# Altium PCB Kretsn_Brillz.PcbDoc
Units mil, origin at the board's own origin, x right, y up, seen from the top; angles counter-clockwise.
Board outline 6490 x 3090 mil, 2 copper layers (Top Layer, Bottom Layer); 15 components, 17 nets, 72 pads, 35 vias.
Unrouted connection lines stored in the file: 4.
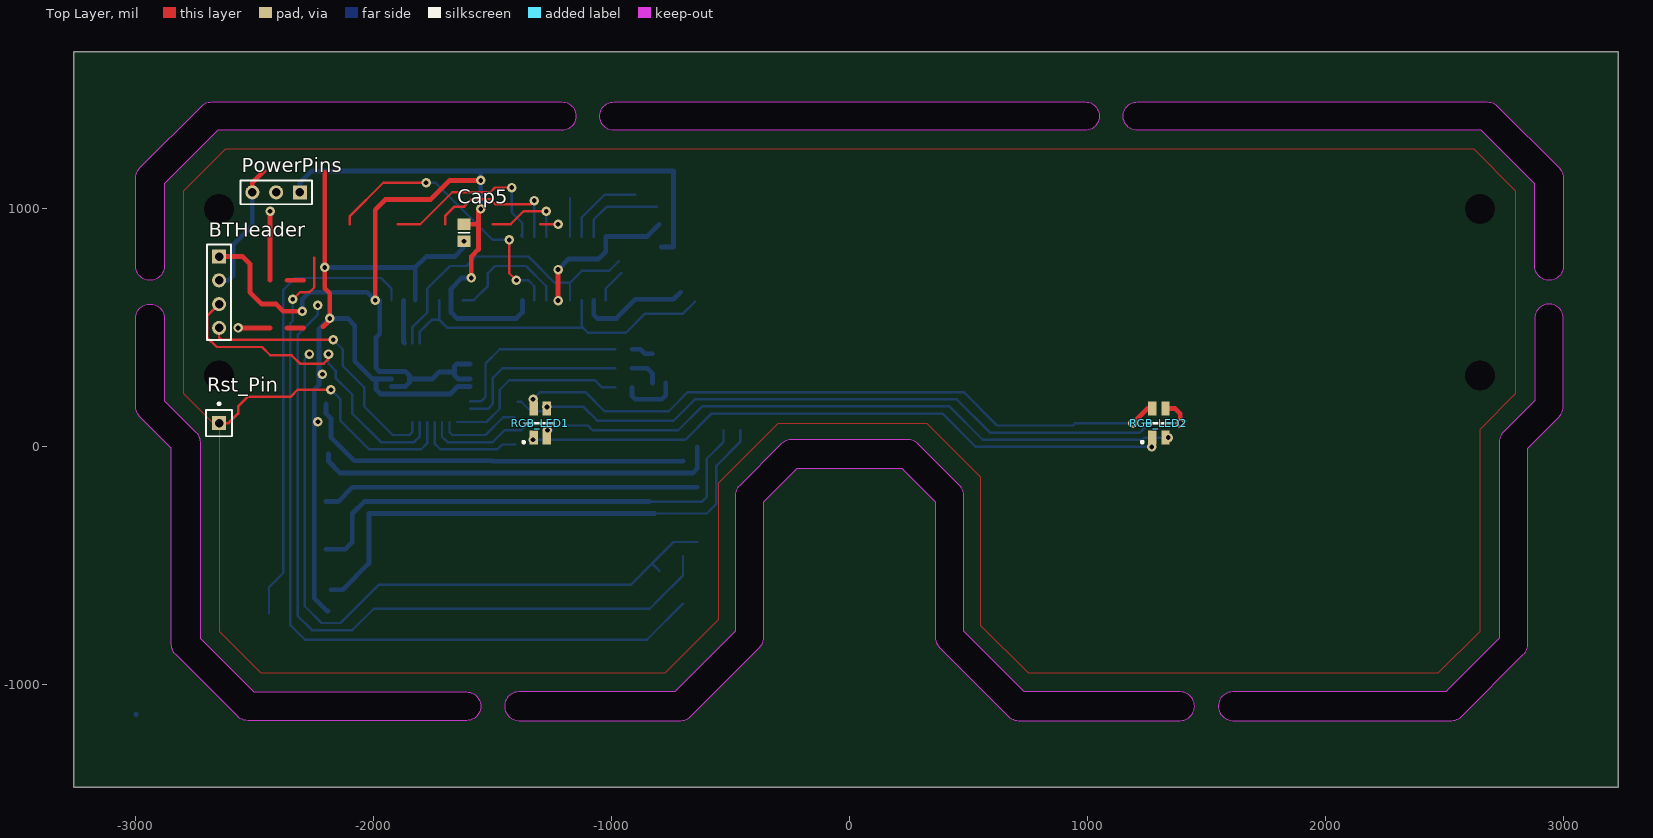
[diagram p0: Top Layer view]
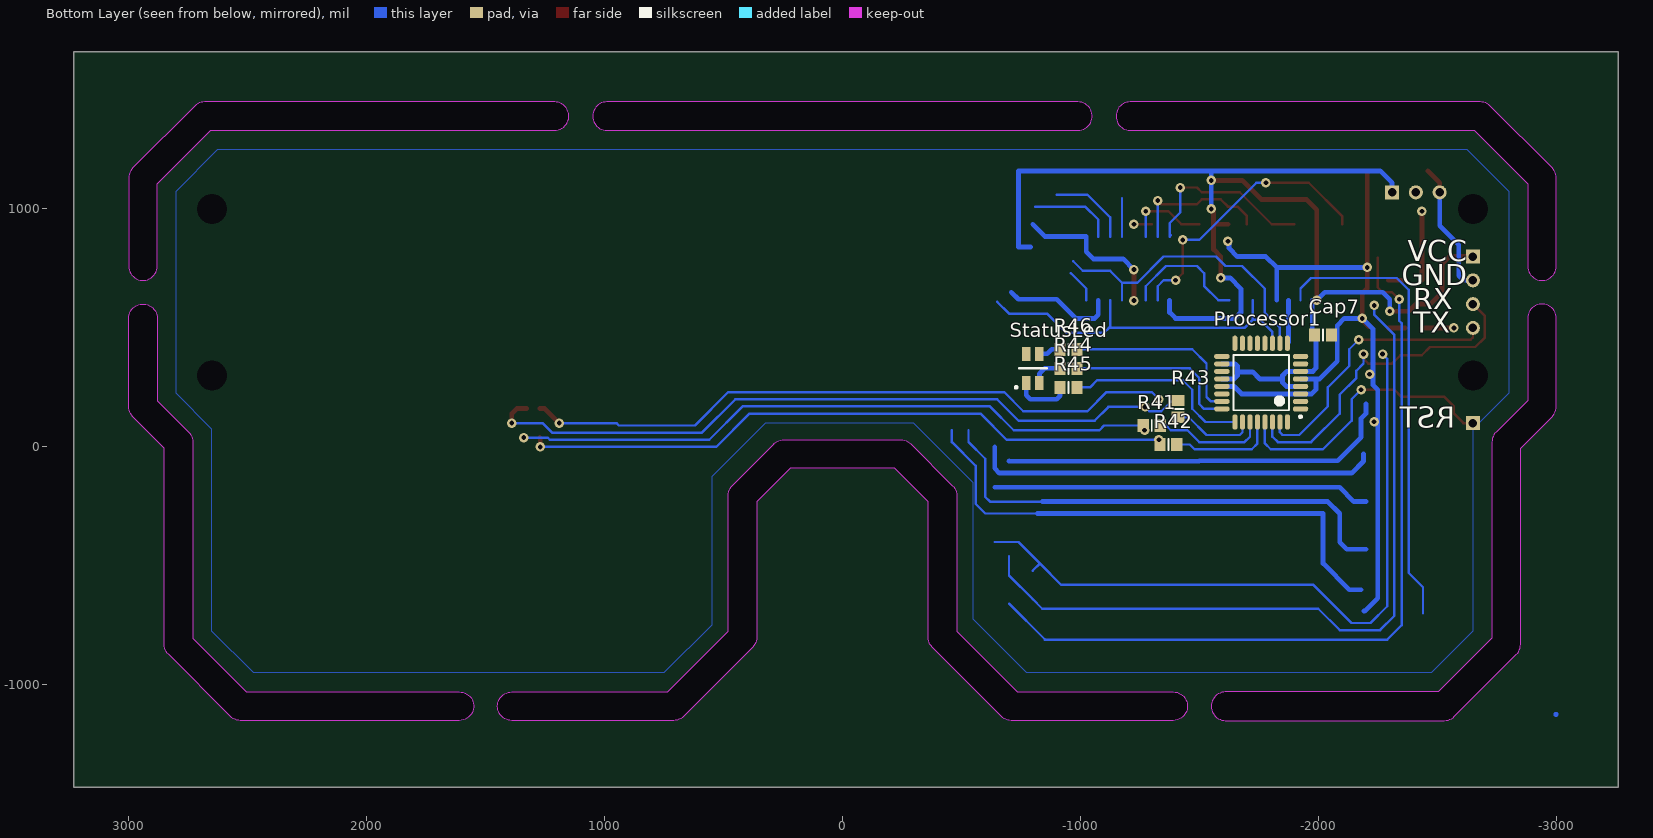
[diagram p1: Bottom Layer view, seen from below]

## Layer stack, top to bottom
Top Solder: solder mask 0.4, Solder Resist, Dk 3.5
Top Layer: signal copper 1.4
Dielectric 1: dielectric 12.6, FR-4, Dk 4.8
Bottom Layer: signal copper 1.4
Bottom Solder: solder mask 0.4, Solder Resist, Dk 3.5

## Board outline
-3260,-1430 3230,-1430 3230,1660 -3260,1660
cut-out: -2850.01,-830 -2850.01,-4.86 -2982.44,127.56 -2982.4,127.53 cw(c-2940,170) -3000.01,170 -3000.01,540 cw(c-2940,540) -2879.99,540 -2879.99,194.86 -2747.56,62.44 -2747.6,62.47 cw(c-2790,20) -2729.98,20 -2729.98,-805.14 -2505.14,-1029.98 -1610,-1029.98 cw(c-1610,-1090) -1549.99,-1090 cw(c-1610,-1090) -1610,-1150.02 -2530,-1150.02 cw(c-2530,-1090) -2572.47,-1132.4 -2572.44,-1132.44 -2832.44,-872.44 -2832.4,-872.47 cw(c-2790,-830)
cut-out: -1390,-1150.02 -710,-1150.02 ccw(c-710,-1090) -667.53,-1132.4 -667.56,-1132.44 -377.56,-842.44 -377.6,-842.47 ccw(c-420,-800) -359.99,-800 -359.99,-229.73 -220.28,-90.03 220.28,-90.03 359.98,-229.73 359.98,-800 ccw(c420,-800) 377.6,-842.47 377.56,-842.44 667.56,-1132.44 667.53,-1132.4 ccw(c710,-1090) 710,-1150.02 1390,-1150.02 ccw(c1390,-1090) 1450.02,-1090 ccw(c1390,-1090) 1390,-1029.98 734.86,-1029.98 480.02,-775.14 480.02,-204.87 ccw(c420,-204.87) 462.4,-162.4 462.44,-162.44 287.58,12.42 287.61,12.39 ccw(c245.14,-30.01) 245.14,30 -245.14,30 ccw(c-245.14,-30.01) -287.61,12.39 -287.58,12.42 -462.44,-162.44 -462.4,-162.4 ccw(c-420,-204.87) -480.01,-204.87 -480.01,-775.14 -734.86,-1029.98 -1390,-1029.98 ccw(c-1390,-1090)
cut-out: 1610,-1150.02 2530,-1150.02 ccw(c2530,-1090) 2572.47,-1132.4 2572.44,-1132.44 2832.44,-872.44 2832.4,-872.47 ccw(c2790,-830) 2850.02,-830 2850.02,-4.86 2982.44,127.56 2982.4,127.53 ccw(c2940,170) 3000.02,170 3000.02,540 ccw(c2940,540) 2879.98,540 2879.98,194.86 2747.56,62.44 2747.6,62.47 ccw(c2790,20) 2729.98,20 2729.98,-805.14 2505.14,-1029.98 1610,-1029.98 ccw(c1610,-1090)
cut-out: 1210,1329.99 cw(c1210,1390) 1210,1450.02 2680,1450.02 cw(c2680,1390) 2722.47,1432.4 2722.44,1432.44 2982.44,1172.44 2982.4,1172.47 cw(c2940,1130) 3000.02,1130 3000.02,760 cw(c2940,760) 2879.98,760 2879.98,1105.14 2655.14,1329.99
cut-out: -990,1329.99 cw(c-990,1390) -990,1450.02 990,1450.02 cw(c990,1390) 1050.02,1390 cw(c990,1390) 990,1329.99
cut-out: -3000.01,760 -3000.01,1130 cw(c-2940,1130) -2982.4,1172.47 -2982.44,1172.44 -2722.44,1432.44 -2722.47,1432.4 cw(c-2680,1390) -2680,1450.02 -1210,1450.02 cw(c-1210,1390) -1149.99,1390 cw(c-1210,1390) -1210,1329.99 -2655.14,1329.99 -2879.99,1105.14 -2879.99,760 cw(c-2940,760)

## Design rules (kind name [scope] priority, off if disabled: settings)
Clearance [All] p1: gap=10 ignorepadtopadclearanceinfootprint=FALSE except(0: Arc-Hole Track-Hole SMDPad-Hole THPad-Hole Via-Hole Fill-Hole Poly-Hole Region-Hole Text-Hole; 9: SMDPad-SMDPad; 30: Arc-Poly Track-Poly SMDPad-Poly THPad-Poly Via-Poly Fill-Poly Poly-Poly Poly-Region Poly-Text)
PolygonConnect [All] p1: connectstyle=Relief reliefconductorwidth=10 reliefentries=4 polygonreliefangle="90 Angle" airgapwidth=10
RoutingVias [All] p1: holewidth=28 width=50 viastyle="Through Hole" minholewidth=20 minwidth=40 maxholewidth=28 maxwidth=50
SolderMaskExpansion [All] p1: expansion=4 istentingtop=FALSE
Width [All] p1: maxlimit=120 minlimit=10 preferedwidth=20
30 further rules are at their usual default settings.

## Components (designator, comment, footprint, x,y, rotation, side; value= is the part's Value field where it differs from the comment)
BTHeader "Header 4" HDR1X4 -2650,800 r270 top
Cap5 "Cap" 6-0805_N -1620,900 r270 top value=100pF
Cap7 "Cap" 6-0805_N -2020,470 r180 bottom value=100pF
PowerPins "Header 3" HDR1X3 -2310,1070 r180 top
Processor1 "ATmega328P-AU" 32A_N -1760,270 r0 bottom
R41 "Res1" 6-0805_N -1300,90 r180 bottom value=1K
R42 "Res1" 6-0805_N -1370,10 r180 bottom value=1K
R43 "Res1" 6-0805_N -1410,160 r270 bottom value=1K
R44 "Res1" 6-0805_N -950,330 r180 bottom value=1K
R45 "Res1" 6-0805_N -950,250 r180 bottom value=1K
R46 "Res1" 6-0805_N -950,410 r180 bottom value=1K
RGB_LED1 "150141M173100" 3528 -1300,100 r90 top
RGB_LED2 "150141M173100" 3528 1300,100 r90 top
Rst_Pin "Socket" PIN1 -2650,100 r0 top
StatusLed "150141M173100" 3528 -800,330 r90 bottom

## Footprints (in the part's own frame and the unit in brackets; to place one, negate y for a bottom-side part, rotate by r counter-clockwise, add the part's x,y. Pads: shape width x height; smd on the part's side, far side on the other; paste and mask are expansions set on the pad)
6-0805_N [mm] "Chip Resistor, Body 2.0x1.2mm, IPC Medium Density"
  rect 1.2x1.4 smd: 1(-0.9,0) 2(0.9,0)
  silkscreen extent 0,-0.6 0,0.6, body extent -1.07,-0.7 1.07,0.7, height 0.7
32A_N [mm] "Thin QFP, 32-Leads, Body 7x7mm, Pitch 0.8mm, IPC Medium Density"
  oval 1.65x0.55 smd: 1(-4.2,2.8) 2(-4.2,2) 3(-4.2,1.2) 4(-4.2,0.4) 5(-4.2,-0.4) 6(-4.2,-1.2) 7(-4.2,-2) 8(-4.2,-2.8) 17(4.2,-2.8) 18(4.2,-2) 19(4.2,-1.2) 20(4.2,-0.4) 21(4.2,0.4) 22(4.2,1.2) 23(4.2,2) 24(4.2,2.8)
  oval 0.55x1.65 smd: 9(-2.8,-4.2) 10(-2,-4.2) 11(-1.2,-4.2) 12(-0.4,-4.2) 13(0.4,-4.2) 14(1.2,-4.2) 15(2,-4.2) 16(2.8,-4.2) 25(2.8,4.2) 26(2,4.2) 27(1.2,4.2) 28(0.4,4.2) 29(-0.4,4.2) 30(-1.2,4.2) 31(-2,4.2) 32(-2.8,4.2)
  silkscreen extent -4.32,-2.95 2.95,3.75, body extent -3.5,-3.5 3.5,3.5, height 1.2
3528 [mm] "Chip LED, 4-Leads, Body 2.8x3.5mm (max), Pitch 1.42mm, IPC Medium Density"
  rect 1.5x0.9 smd: 1(1.55,0.707) 2(1.55,-0.71) 3(-1.55,0.707) 4(-1.55,-0.707)
  silkscreen extent -2.15,-1.5 0.03,1.9, body extent -1.75,-1.4 1.75,1.4, height 1.87
HDR1X3 [mm] "Connector; Header; 3 Position"
  rect 1.5x1.5 hole 0.9: 1(0,0)
  round 1.5 hole 0.9: 2(2.54,0) 3(5.08,0)
  silkscreen extent -1.27,-1.27 6.35,1.27
HDR1X4 [mm] "Connector; Header; 4 Position"
  rect 1.5x1.5 hole 0.9: 1(0,0)
  round 1.5 hole 0.9: 2(2.54,0) 3(5.08,0) 4(7.62,0)
  silkscreen extent -1.27,-1.27 8.89,1.27
PIN1 [mm] "Connector; Plug"
  rect 1.5x1.5 hole 0.9: 1(0,0)
  silkscreen extent -1.4,-1.4 1.4,2.17

## Part data
BTHeader: "Header, 4-Pin", LatestRevisionDate=17-Jul-2002, LatestRevisionNote="Re-released for DXP Platform.", Publisher="Altium Limited"
Cap5 Cap7: "Capacitor", LatestRevisionDate=17-Jul-2002, LatestRevisionNote="Re-released for DXP Platform.", PackageDescription="Radial Cap, Thru-Hole; 2 Leads; 0.3 in Pin Spacing", PackageReference=RAD-0.3, Published=8-Jun-2000, Publisher="Altium Limited"
PowerPins: "Header, 3-Pin", LatestRevisionDate=17-Jul-2002, LatestRevisionNote="Re-released for DXP Platform.", Publisher="Altium Limited"
Processor1: "8-bit AVR Microcontroller, 32KB Flash, 1KB EEPROM, 2KB SRAM, 32-pin TQFP, Industrial Grade (-40°C to 85°C)", Supplier Part Number 1=ATMEGA328P-AU-ND, Code_JEDEC=MS-026-ABA, ComponentLink1Description="Manufacturer Link", ComponentLink1URL=http://www.atmel.com/products/avr/default.asp?, ComponentLink2Description="ATmega48A/48PA/88A/88PA/168A/168PA/328/328P Datasheet", ComponentLink2URL=http://www.atmel.com/dyn/resources/prod_documents/8271.pdf, ComponentLink3Description="ATmega48A/48PA/88A/88PA/168A/168PA/328/328P Summary", ComponentLink3URL=http://www.atmel.com/dyn/resources/prod_documents/8271S.pdf, ComponentLink4Description="Atmel.com Home", ComponentLink4URL=http://www.atmel.com, DatasheetVersion="revA, Jan-2010", PackageDescription="32-Lead, 7x7x1.0 mm Body, 0.8mm Lead Pitch, Thin Profile Plastic Quad Flat Package (TQFP)", PackageReference=32A, PackageVersion="revB, Oct-2001", Published=1-Apr-2010, Publisher="Altium Limited", Supplier 1=Digi-Key, Supplier 2=Farnell, Supplier 3=Mouser, Supplier Part Number 2=1715486, Supplier Part Number 3=556-ATMEGA328P-AU
R41 R42 R43 R44 R45 R46: "Resistor", LatestRevisionDate=17-Jul-2002, LatestRevisionNote="Re-released for DXP Platform.", PackageDescription="Axial Device, Thru-Hole; 2 Leads; 0.3 in Pin Spacing", PackageReference=AXIAL-0.3, Published=8-Jun-2000, Publisher="Altium Limited"
RGB_LED1 RGB_LED2 StatusLed: library part "WL-SFTW 3528 150141M173100", "SMD Full-Color Top LED, WL-SFTW, Red & Green & Blue", Color="Red & Green & Blue", Manufacturer="Würth Elektronik eiSos GmbH", ComponentLink1Description=Manufacturer, ComponentLink1URL=http://www.we-online.de, ComponentLink2Description=Datasheet, ComponentLink2URL=http://katalog.we-online.com/led/datasheet/150141M173100.pdf, Created by="Christin Otto", Created Date="June 2013", PartNo=150141M173100
Rst_Pin: LatestRevisionDate=17-Jul-2002, LatestRevisionNote="Re-released for DXP Platform.", Publisher="Altium Limited"

## Free pads (board coordinates)
  round 60 hole 125 unplated: 33(-2650,1000) 33(2650,1000) 35(-2650,300) 35(2650,300)

## Via types
v1: diameter 40, hole 20, Top Layer to Bottom Layer, 35 vias

## Nets (pads, with @x,y where several pads share a name; then routed paths per layer and width w, separated by ;. In a path a pad name is that pad's centre, name@x,y a point inside that pad or via, vN(x,y) a via of type N, cw(c..) or ccw(c..) an arc to the next point about the centre after c; other vN are vias at no path point)
GND: BTHeader.2 Cap5.2 Cap7.2 PowerPins.3 Processor1.3 Processor1.5 Processor1.21 | length 4880.2
  Top Layer w20: PowerPins.3 -2510,1110 -2460,1160 ; -2212.6,505.71 -2185.2,533.11 v1(-2185.2,540) -2185.2,645.2 -2205.71,665.71 v1(-2205.71,754.29) -2205.71,1154.29 ; v1(-1225,615) v1(-1225,745)
  Bottom Layer w20: BTHeader.2 -2610,700 -2590,720 -2590,850 -2510,930 PowerPins.3 ; v1(-2205.71,754.29) -1825,754.29 ; -2192.6,-690 -2195.2,-690 -2250,-635.2 -2250,240 -2230,260 -2230,495.2 v1(-2185.2,540) -2110,540 -2080,510 -2080,360 -2005.75,285.75 -1990,285.75 ; Processor1.5 -1990,285.75 ; -1825,616.14 -1825,754.29 ; v1@-1625,864.57 -1625,835 -1660,800 -1779.29,800 -1825,754.29 ; Processor1.21 -1645.75,254.25 -1677.24,222.76 Processor1.3 -1972.76,222.76 -1990,240 -1990,285.75 ; v1(-1225,745) -1180,790 -1055,790 -1025,820 -1025,883.86 -1016.14,883.86 -851.57,883.86 -800,935.43
  other v1: -2234.29,105.71 -2215.71,305.71 -1620,864.57
NetBTHeader_3: BTHeader.3 Processor1.30 | length 1439.8
  Top Layer w10: BTHeader.3 -2700,550 -2700,460 -2660,420 -2470,420 -2435,385 -2345,385 -2310,350 -2210,350 -2190,370 v1(-2190,390)
  Bottom Layer w10: v1(-2190,390) -2190,350 -2160,320 -2160,290 -2090,220 -2090,140 -1970,20 -1830,20 -1807.24,42.76 Processor1.30
NetBTHeader_4: BTHeader.4 Processor1.31 | length 1157
  Top Layer w10: BTHeader.4 -2650,460 -2640,450 v1(-2170,450)
  Bottom Layer w10: v1(-2170,450) -2130,410 -2130,340 -2040,250 -2040,170 -1920,50 -1850,50 -1838.74,61.26 Processor1.31
NetProcessor1_23: Processor1.23 R46.2 | length 781.8
  Bottom Layer w10: Processor1.23 -1548.74,191.26 -1530,210 -1530,350 -1470,410 R46.2
NetProcessor1_24: Processor1.24 R44.2 | length 744.2
  Bottom Layer w10: Processor1.24 -1520.24,159.76 -1500,180 -1500,290 -1460,330 R44.2
NetProcessor1_25: Processor1.25 R45.2 | length 796.3
  Bottom Layer w10: Processor1.25 -1525.35,104.65 -1470,160 -1470,240 -1430,280 -1070,280 -1040,250 R45.2
NetProcessor1_26: Processor1.26 R43.2 | length 350.2
  Bottom Layer w10: Processor1.26 -1681.26,61.26 -1670,50 -1530,50 -1455.43,124.57 R43.2
NetProcessor1_27: Processor1.27 R41.2 | length 477.6
  Bottom Layer w10: Processor1.27 -1712.76,42.76 -1690,20 -1500,20 -1450,70 -1380,70 -1360,90 R41.2
NetProcessor1_28: Processor1.28 R42.2 | length 447.5
  Bottom Layer w10: Processor1.28 -1744.25,14.25 -1720,-10 -1480,-10 -1460,10 R42.2
NetProcessor1_29: Processor1.29 Rst_Pin.1 | length 1206.5
  Top Layer w10: Rst_Pin.1 -2610,100 -2570,140 -2570,170 -2530,210 -2350,210 -2320,240 v1(-2180,240)
  Bottom Layer w10: v1(-2180,240) -2140,200 -2140,110 -2020,-10 -1800,-10 -1775.75,14.25 Processor1.29
NetR41_1: R41.1 RGB_LED1.4 RGB_LED2.4 | length 2746.1
  Top Layer w20: RGB_LED2.4 v1(1338.98,38.98)
  Bottom Layer w10: v1(-1270,70) R41.1@-1250,70 ; R41.1 -1100,90 -1080,70 -720,70 -620,170 420,170 560,30 1230,30 1238.98,38.98 v1(1338.98,38.98)
NetR42_1: R42.1 RGB_LED1.3 RGB_LED2.3 | length 2743.4
  Top Layer w20: v1(1270,0) 1270,36.83 RGB_LED2.3
  Bottom Layer w10: v1(-1330,30) -690,30 -580,140 390,140 530,0 v1(1270,0)
NetR43_1: R43.1 RGB_LED1.2 RGB_LED2.2 | length 3055.2
  Top Layer w20: RGB_LED2.2 1368.98,161.02 1390,140 v1(1390,100)
  Bottom Layer w10: R43.1@-1394.57,190 -1380,190 -1340,150 -1290,150 v1(-1272.05,167.95) -1117.95,167.95 -1060,110 -740,110 -650,200 450,200 590,60 1220,60 1260,100 v1(1390,100)
NetR44_1: R44.1 StatusLed.4 | length 134.8
  Bottom Layer w20: R44.1 -850,330 -827.85,307.85 StatusLed.4
NetR45_1: R45.1 StatusLed.3 | length 242.4
  Bottom Layer w20: R45.1 -914.57,214.57 -900,200 -790,200 -772.15,217.85 StatusLed.3
NetR46_1: R46.1 StatusLed.2 | length 94.5
  Bottom Layer w20: R46.1 -880,410 -861.02,391.02 StatusLed.2
VCC: BTHeader.1 Cap5.1 Cap7.1 PowerPins.1 Processor1.4 Processor1.6 Processor1.18 Processor1.20 RGB_LED1.1 RGB_LED2.1 StatusLed.1 | length 9056.1
  Top Layer w20: BTHeader.1 -2550,800 -2520,770 -2520,650 -2470,600 -2410,600 -2380,570 v1(-2300,570) ; v1(-1993.86,616.14) -1993.86,996.14 -1950,1040 -1760,1040 -1680,1120 v1(-1550,1120) ; Cap5.1 -1565.43,935.43 ; v1(-1590,710) -1590,800 -1560,830 -1560,990 v1(-1550,1000) ; v1(1190,100) 1251.02,161.02 RGB_LED2.1
  Bottom Layer w10: v1(-1330,200) -1300,230 -1110,230 -1030,150 -760,150 -680,230 480,230 620,90 940,90 950,100 1000,100 v1(1190,100)
  Bottom Layer w20: PowerPins.1 -2310,1110 -2260,1160 -1550,1160 ; v1(-2300,570) -2300,620 -2270,650 -2027.72,650 v1(-1993.86,616.14) ; v1@-1975,616.14 -1975,475 -1990,460 -1990,330 -1977.24,317.24 Processor1.6 -1867.24,317.24 -1850,300 -1850,285 ; Processor1.4 -1865.75,254.25 -1850,270 -1850,285 ; Processor1.20 -1645.75,285.75 -1660,300 -1660,315 ; Processor1.18 -1651.26,348.74 -1660,340 -1660,315 ; v1(-1590,710) -1630,710 -1675,665 -1675,616.14 -1675,565 -1650,540 -1400,540 -1375,565 -1375,616.14 ; v1(-1550,1000) v1(-1550,1120) -1550,1160 ; -1075,616.14 -1075,555 -1060,540 -980,540 -900,620 -790,620 -740,620 -710,650 ; -790,840 -740,840 -740,1160 -1550,1160 ; -1850,285 -1755,285 -1725,315 -1660,315
pads on no net: PowerPins.2 Processor1.1 Processor1.2 Processor1.7 Processor1.8 Processor1.9 Processor1.10 Processor1.11 Processor1.12 Processor1.13 Processor1.14 Processor1.15 Processor1.16 Processor1.17 Processor1.19 Processor1.22 Processor1.32
copper on no net: | length 28737.7
  Top Layer w10: v1(-2340,620) -2310,650 -2270,650 -2250,670 -2250,794.29 ; -2100,935.43 -2100,970 -1960,1110 v1(-1780,1110) ; -1900,935.43 -1804.57,935.43 -1670,1070 -1510,1070 -1490,1090 v1(-1420,1090) ; -1700,935.43 -1700,970 -1660,1010 -1620,1010 -1590,1040 -1510,1040 -1490,1020 -1340,1020 v1(-1325,1035) ; -1500,935.43 -1424.57,935.43 -1370,990 v1(-1275,990) ; v1(-1430,870) -1430,730 v1(-1400,700) ; -1300,935.43 -1225.43,935.43 v1(-1225,935.87)
  Top Layer w20: v1(-2570,500) -2435.43,500 ; -2435.43,700 v1(-2435.43,990) ; -2364.57,500 -2294.29,500 ; -2364.57,700 -2294.29,700
  Bottom Layer w10: -2440,-700 -2440,-590 -2380,-530 -2380,660 -2330,710 -1970,710 -1925,665 -1925,616.14 ; v1(-2340,620) -2340,530 -2350,520 -2350,-750 -2290,-810 -2050,-810 -1850,-810 -1650,-810 -1450,-810 -1250,-810 -1050,-810 -850,-810 -850,-808.66 -700,-658.66 ; v1(-2270,390) -2290,370 -2290,-670 -2220,-740 -2140,-740 -1980,-580 -1780,-580 -1580,-580 -1380,-580 -1180,-580 -980,-580 -920,-580 -830,-490 ; v1(-2235.71,594.29) -2235.71,554.29 -2320,470 -2320,-710 -2260,-770 -2090,-770 -2000,-680 -1800,-680 -1600,-680 -1400,-680 -1200,-680 -1000,-680 -840,-680 -800,-640 -700,-540 -700,-458.66 ; -1838.74,435.35 -1838.74,501.26 -1775,565 -1775,616.14 -1775,665 -1680,760 -1610,760 -1570,800 -1350,800 -1240,690 -1175,690 ; -1807.24,435.35 -1807.24,482.76 -1755,535 -1725,535 ; v1(-1780,1110) -1740,1110 -1500,870 v1(-1430,870) ; -1725,616.14 -1725,535 ; -1625,616.14 -1580,616.14 -1520,676.14 -1520,730 -1490,760 -1360,760 -1275,675 -1275,616.14 ; v1(-1420,1090) -1420,985 -1375,940 -1375,883.86 -1381.14,890 ; v1(-1400,700) -1350,700 -1325,675 -1325,616.14 ; -1325,883.86 v1(-1325,1035) ; -1275,883.86 v1(-1275,990) ; -1175,616.14 -1175,690 ; -1175,883.86 -1175,1045 ; -1125,505 -1125,616.14 ; -1125,883.86 -1125,965 -1030,1060 -900,1060 ; -1075,883.86 -1075,955 -1020,1010 -810,1010 ; -1025,616.14 -1025,665 -960,730 ; -970,780 -1010,740 -1125,740 -1175,690 ; -840,-230 -620,-230 -600,-210 -600,-50 -530,20 -530,70 ; -820,-280 -600,-280 -560,-240 -560,-80 -460,20 -460,70 ; -800,-520 -830,-490 ; -650,610 -700,560 -860,560 -940,480 -1100,480 -1120,500 -1690,500 -1725,535 ; -640,-400 -740,-400 -830,-490
  Bottom Layer w19.68: -2999.9,-1124.87 cw(c-2996.9,-1127.01) -2999.87,-1124.82 cw(c-2988.42,-1133.25) -2999.83,-1124.76 ; -2999.85,-1124.83 -2999.81,-1124.79 ; -2999.79,-1124.57 ccw(c-3004.78,-1125.11) -2999.8,-1124.49 cw(c-2997.58,-1124.22) -2999.81,-1124.42 cw(c-2999.17,-1124.36) -2999.81,-1124.37 ; -2999.78,-1124.43 cw(c-2999.36,-1124.38) -2999.79,-1124.37 ; -2999.8,-1124.26 ccw(c-2998.85,-1124.4) -2999.81,-1124.32 ; -2999.76,-1124.17 ccw(c-2999.46,-1124.28) -2999.77,-1124.22 ccw(c-2998.91,-1124.39) -2999.78,-1124.29 ; -2999.68,-1124.1 ccw(c-2998.67,-1124.07) -2999.68,-1124.15 ccw(c-2998.66,-1124.07) -2999.67,-1124.22 ccw(c-2999.19,-1124.15) -2999.66,-1124.27 ; -2999.67,-1124 cw(c-2993.91,-1131.77) -2999.62,-1123.96 ; -2999.53,-1124.07 cw(c-2996.33,-1123.73) -2999.53,-1124.02 ; -2999.49,-1124.2 cw(c-2997.22,-1123.24) -2999.51,-1124.15 ; -2999.44,-1124.29 cw(c-2999.95,-1124.78) -2999.4,-1124.33 cw(c-2999.83,-1124.68) -2999.37,-1124.38 -2999.36,-1124.34 ; -2999.47,-1123.89 -2999.41,-1123.89 ; -2999.4,-1124.66 ccw(c-2999.49,-1124.45) -2999.36,-1124.64 ccw(c-2999.8,-1123.99) -2999.29,-1124.59 ccw(c-3005.24,-1117.6) -2999.17,-1124.48 -2999.09,-1124.41 ; -2999.39,-1123.82 ccw(c-2999.02,-1124.71) -2999.44,-1123.85 ccw(c-2998.99,-1124.75) -2999.49,-1123.87 ccw(c-2999.11,-1124.54) -2999.53,-1123.9 ccw(c-2998.52,-1125.44) -2999.58,-1123.93 ; -2999.35,-1124.55 ccw(c-3010.79,-1116.37) -2999.31,-1124.48 ; -2999.33,-1124.18 cw(c-3000.01,-1124.83) -2999.29,-1124.22 ; -2999.35,-1123.81 cw(c-2999.16,-1124.37) -2999.3,-1123.79 ; -2999.28,-1124.77 ccw(c-2998.55,-1123.91) -2999.24,-1124.8 ccw(c-2998.21,-1123.47) -2999.18,-1124.84 ; -2999.26,-1124.74 ccw(c-2999.04,-1124.45) -2999.21,-1124.77 ccw(c-2998.9,-1124.18) -2999.15,-1124.8 ccw(c-2998.87,-1124.11) -2999.08,-1124.83 ; -2999.21,-1124.61 ccw(c-2998.66,-1123.78) -2999.16,-1124.64 ; -2999.2,-1124.32 -2999.17,-1124.28 ; -2999.21,-1123.8 ccw(c-2998.46,-1127.29) -2999.26,-1123.81 ; -2999.06,-1124.9 ccw(c-2998.94,-1124.43) -2998.99,-1124.91 ; -2999.01,-1124.68 -2999.01,-1124.59 ccw(c-3006.89,-1124.59) -2999.01,-1124.53 ; -2998.98,-1124.25 cw(c-3000.59,-1125.54) -2998.93,-1124.32 cw(c-2999.45,-1124.7) -2998.89,-1124.37 cw(c-2999.26,-1124.58) -2998.87,-1124.42 ; -2998.85,-1124.65 ccw(c-2999.23,-1124.56) -2998.84,-1124.59 ccw(c-2999.27,-1124.55) -2998.84,-1124.52 ccw(c-2999.14,-1124.54) -2998.85,-1124.46 ; -2998.84,-1124.32 ccw(c-3004.4,-1124.96) -2998.85,-1124.27 ; -2998.84,-1123.84 ccw(c-2998.94,-1123.88) -2998.87,-1123.79 ccw(c-2998.95,-1123.88) -2998.91,-1123.77 ccw(c-2998.98,-1124) -2998.98,-1123.76 ccw(c-2998.99,-1124.87) -2999.09,-1123.76 ccw(c-2998.98,-1125.08) -2999.16,-1123.77 ccw(c-2998.92,-1125.45) -2999.23,-1123.78 ; -2998.82,-1124.59 ccw(c-2999.21,-1124.55) -2998.82,-1124.54 ccw(c-2999.17,-1124.55) -2998.82,-1124.49 ccw(c-2999.16,-1124.55) -2998.83,-1124.44 ; -2998.73,-1124.08 ccw(c-2996.4,-1121.79) -2998.69,-1124.12 ccw(c-2997.24,-1122.63) -2998.66,-1124.15 ; -2998.75,-1123.89 cw(c-2999.02,-1126) -2998.7,-1123.9 cw(c-2998.93,-1125.47) -2998.65,-1123.91 ccw(c-2999.07,-1126.38) -2998.69,-1123.87 ccw(c-2999.07,-1126.33) -2998.75,-1123.87 ; -2998.6,-1124.42 ccw(c-2999.01,-1124.33) -2998.6,-1124.37 ; -2998.53,-1124.22 ccw(c-2997.86,-1123.48) -2998.49,-1124.25 ; -2998.48,-1124.89 cw(c-2999.7,-1116.04) -2998.55,-1124.9 ; -2998.49,-1124.87 cw(c-2999.38,-1118.62) -2998.56,-1124.88 ; -2998.44,-1124.42 cw(c-2999.79,-1127.09) -2998.37,-1124.45 ; -2998.45,-1124.28 ccw(c-2998.13,-1123.8) -2998.41,-1124.31 ; -2998.45,-1124.25 ccw(c-2998.14,-1123.81) -2998.38,-1124.3 ; -2998.38,-1124.76 cw(c-2999.05,-1123.37) -2998.46,-1124.8 cw(c-2998.76,-1124.07) -2998.53,-1124.82 cw(c-2998.74,-1124.12) -2998.6,-1124.84 cw(c-2998.83,-1123.71) -2998.67,-1124.85 cw(c-2998.78,-1124.08) -2998.75,-1124.86 cw(c-2998.81,-1123.07) -2998.85,-1124.86 cw(c-2998.81,-1123.09) -2998.94,-1124.85 cw(c-2998.89,-1124.24) -2999.01,-1124.85 cw(c-2998.87,-1124.13) -2999.08,-1124.83 ; -2998.34,-1124.82 cw(c-2998.18,-1125.45) -2998.29,-1124.8 ; -2998.34,-1124.74 cw(c-2996.55,-1128.8) -2998.29,-1124.72 ; -2998.35,-1124.16 ccw(c-2992.88,-1111.87) -2998.27,-1124.2 ; -2998.27,-1124.57 cw(c-2999.09,-1122.44) -2998.41,-1124.61 cw(c-2999.26,-1121.9) -2998.56,-1124.66 cw(c-2999.2,-1122.12) -2998.69,-1124.69 cw(c-2998.78,-1124.23) -2998.78,-1124.7 ccw(c-2998.8,-1124.1) -2998.73,-1124.72 ccw(c-2998.84,-1123.78) -2998.65,-1124.7 ccw(c-2999.06,-1122.64) -2998.56,-1124.68 ccw(c-2998.99,-1122.93) -2998.47,-1124.66 ccw(c-2999.55,-1121.08) -2998.36,-1124.62 ccw(c-2999.53,-1121.14) -2998.26,-1124.59 ccw(c-2998.54,-1123.83) -2998.19,-1124.56 -2998.25,-1124.51 ; -2998.19,-1124.68 ccw(c-2997.02,-1127.65) -2998.24,-1124.7 ; -2998.15,-1124.73 cw(c-2994.75,-1131.91) -2998.09,-1124.71 cw(c-2997.28,-1126.46) -2998.04,-1124.68 ; -2998.1,-1124.62 -2998.21,-1124.66 ccw(c-2997.03,-1127.67) -2998.26,-1124.68 ; -2998.05,-1124.81 ccw(c-2998.05,-1124.19) -2997.98,-1124.81 ccw(c-2998.08,-1123.87) -2997.89,-1124.8 ; -2998.04,-1124.19 cw(c-2997.48,-1126.33) -2997.95,-1124.17 ; -2998.06,-1124.17 cw(c-2997.49,-1126.15) -2997.99,-1124.15 cw(c-2997.56,-1125.87) -2997.93,-1124.13 ; -2998.02,-1124.84 ccw(c-2998.04,-1124.32) -2997.96,-1124.83 ccw(c-2998.22,-1123.09) -2997.89,-1124.82 ; -2998.01,-1124.7 ccw(c-2997.37,-1126.3) -2998.06,-1124.72 ; -2997.99,-1124.66 ccw(c-2997.61,-1125.69) -2998.04,-1124.68 ; -2998.02,-1124.43 ccw(c-3000.18,-1118.52) -2997.93,-1124.4 ccw(c-2999.26,-1120.91) -2997.84,-1124.36 ccw(c-2998.02,-1123.92) -2997.79,-1124.34 ; -2997.94,-1124.54 cw(c-2997.5,-1126.14) -2997.88,-1124.52 ; -2997.89,-1124.64 ccw(c-2999.6,-1115.79) -2997.74,-1124.61 ccw(c-2998.24,-1122.24) -2997.63,-1124.58 ; -2997.9,-1124.55 cw(c-2997.28,-1129.72) -2997.81,-1124.54 ccw(c-2998.3,-1119.76) -2997.7,-1124.53 ccw(c-2997.85,-1123.36) -2997.62,-1124.52 ccw(c-2997.73,-1123.92) -2997.56,-1124.5 cw(c-2997.73,-1123.99) -2997.63,-1124.5 ; -2997.92,-1124.42 ccw(c-2998.53,-1122.74) -2997.84,-1124.39 ccw(c-2998.09,-1123.79) -2997.78,-1124.36 ; -2997.85,-1124.65 ccw(c-2998.13,-1123.04) -2997.8,-1124.64 ccw(c-2998.96,-1119.09) -2997.72,-1124.63 ccw(c-2998.96,-1119.07) -2997.65,-1124.61 ; -2997.78,-1124.48 ccw(c-3003.75,-1114.56) -2997.69,-1124.43 ccw(c-3002.64,-1116.38) -2997.61,-1124.38 cw(c-2999.88,-1120.79) -2997.65,-1124.43 ; -2997.78,-1124.14 ccw(c-2997.68,-1125.24) -2997.86,-1124.15 ccw(c-2997.53,-1126.09) -2997.95,-1124.17 ; -2997.75,-1124.27 ccw(c-2998.06,-1133.46) -2997.8,-1124.27 ; -2997.74,-1124.13 cw(c-2997.65,-1126.63) -2997.68,-1124.13 cw(c-2997.63,-1128.74) -2997.63,-1124.13 ; -2997.68,-1124.29 cw(c-2998.12,-1123.77) -2997.73,-1124.33 cw(c-2998.02,-1123.92) -2997.78,-1124.36 ; -2997.64,-1124.75 cw(c-2998.05,-1123.68) -2997.71,-1124.78 cw(c-2998.14,-1123.42) -2997.8,-1124.8 cw(c-2998.23,-1123.01) -2997.89,-1124.82 ; -2997.67,-1124.25 -2997.8,-1124.25 ; -2997.6,-1124.6 cw(c-2997.98,-1123.2) -2997.65,-1124.61 ; -2997.59,-1124.47 cw(c-2997.73,-1123.94) -2997.65,-1124.48 ; -2997.62,-1124.11 ccw(c-2997.68,-1125) -2997.69,-1124.11 ccw(c-2997.67,-1125.25) -2997.78,-1124.11 ccw(c-2997.62,-1125.79) -2997.87,-1124.12 ccw(c-2997.73,-1125.09) -2997.93,-1124.13 ; -2997.55,-1124.65 cw(c-2997.82,-1124.43) -2997.59,-1124.69 cw(c-2997.73,-1124.53) -2997.64,-1124.72 cw(c-2997.8,-1124.41) -2997.69,-1124.75 cw(c-2998.26,-1122.91) -2997.79,-1124.77 cw(c-2998.32,-1122.66) -2997.89,-1124.8 ; -2997.56,-1124.56 cw(c-2998.04,-1123) -2997.63,-1124.58 ; -2997.54,-1124.29 ccw(c-2999.22,-1124.22) -2997.54,-1124.24 ; -2997.48,-1124.55 ccw(c-2998.84,-1124.39) -2997.48,-1124.5 ccw(c-2999,-1124.38) -2997.47,-1124.43 ccw(c-2998.15,-1124.41) -2997.47,-1124.37 ; -2999.79,-1124.37 cw(c-2998.89,-1124.39) -2999.78,-1124.29 ; -2999.58,-1123.93 ccw(c-2998.24,-1125.86) -2999.62,-1123.96 ; -2999.3,-1123.79 cw(c-2998.95,-1125.3) -2999.23,-1123.78 ; -2999.31,-1123.82 cw(c-2998.7,-1126.28) -2999.26,-1123.81 ; -2999.08,-1124.87 ccw(c-2998.95,-1124.45) -2999.01,-1124.89 ; -2998.99,-1124.91 ccw(c-2998.78,-1122.88) -2998.89,-1124.92 ; -2999.01,-1124.89 ccw(c-2998.81,-1123.38) -2998.91,-1124.9 ; -2998.89,-1124.92 ccw(c-2998.78,-1122.85) -2998.79,-1124.92 ; -2998.91,-1124.9 ccw(c-2998.8,-1123.24) -2998.8,-1124.9 ; -2998.85,-1124.46 ccw(c-2999.21,-1124.56) -2998.87,-1124.42 ; -2998.83,-1124.44 ccw(c-2999.19,-1124.56) -2998.85,-1124.39 ; -2998.79,-1124.92 ccw(c-2998.78,-1124.02) -2998.7,-1124.92 ; -2998.8,-1124.9 ccw(c-2998.8,-1123.7) -2998.7,-1124.9 ; -2998.7,-1124.92 ccw(c-2999,-1121.55) -2998.63,-1124.91 ; -2998.7,-1124.9 ccw(c-2998.91,-1122.25) -2998.63,-1124.89 ; -2998.63,-1124.91 ccw(c-2999.06,-1121) -2998.55,-1124.9 ; -2998.63,-1124.89 ccw(c-2998.98,-1121.71) -2998.56,-1124.88 ; -2998.38,-1124.3 ccw(c-2996.07,-1119.64) -2998.24,-1124.36 ccw(c-2994.36,-1115.91) -2998.09,-1124.43 -2998.2,-1124.41 cw(c-2996.3,-1119.97) -2998.28,-1124.37 cw(c-2997.37,-1122.35) -2998.35,-1124.34 cw(c-2997.69,-1123) -2998.41,-1124.31 ; -2998.29,-1124.72 cw(c-2996.43,-1129.08) -2998.24,-1124.7 ; -2998.31,-1124.7 cw(c-2996.62,-1128.67) -2998.26,-1124.68 ; -2997.98,-1124.26 cw(c-2997.95,-1123.42) -2998.04,-1124.26 ccw(c-2997.93,-1123.15) -2998,-1124.24 ; -2997.98,-1124.26 ccw(c-2997.66,-1115.67) -2997.86,-1124.27 cw(c-2998.26,-1142.13) -2997.8,-1124.27 ; -2998,-1124.24 ccw(c-2997.86,-1122.01) -2997.92,-1124.24 ccw(c-2997.61,-1113.49) -2997.8,-1124.25 ; -2997.63,-1124.5 cw(c-2997.91,-1123) -2997.72,-1124.51 ccw(c-2997.74,-1123.84) -2997.65,-1124.48
  Bottom Layer w20: -2200,-430 -2120,-430 -2090,-400 -2090,-280 -2040,-230 -1840,-230 -1640,-230 -1440,-230 -1240,-230 -1040,-230 -840,-230 ; -2200,-230 -2150,-230 -2090,-170 -2040,-170 -1840,-170 -1640,-170 -1440,-170 -1240,-170 -1040,-170 -840,-170 -640,-170 ; -2200,180 -2200,140 -2180,120 -2180,40 -2081.34,-58.66 -2080.67,-58.66 -1500,-58.66 -1498.66,-60 -1280,-60 -1080,-60 -880,-60 -702.68,-60 -701.34,-58.66 -700,-60 ; -2190,-30 -2190,-60 -2140,-110 -2040,-110 -1840,-110 -1640,-110 -1440,-110 -1040,-110 -840,-110 -660,-110 -640,-90 -640,0 ; -2180,-600 -2130,-600 -2020,-490 -2020,-280 -1820,-280 -1620,-280 -1420,-280 -1220,-280 -1020,-280 -820,-280 ; -1875,616.14 -1875,440.12 -1870.24,435.35

## Polygon pours and split planes (outlines as drawn)
GND on Bottom Layer "Top Layer-No Net" (solid, shelved, pour order 2): -2800,1000 -2800,225 -2725,150 -2650,75 -2650,-125 -2650,-775 -2475,-950 -950,-950 -775,-950 -575,-750 -550,-725 -550,-175 -550,-150 -300,100 325,100 550,-125 550,-700 550,-750 750,-950 2075,-950 2475,-950 2650,-775 2650,75 2800,225 2800,1025 2800,1075 2625,1250 2250,1250 -2550,1250 -2625,1250 -2800,1075
GND on Top Layer "Top Layer-No Net" (solid, shelved, pour order 0): -2800,1000 -2800,225 -2725,150 -2650,75 -2650,-125 -2650,-775 -2475,-950 -950,-950 -775,-950 -575,-750 -550,-725 -550,-175 -550,-150 -300,100 325,100 550,-125 550,-700 550,-750 750,-950 2075,-950 2475,-950 2650,-775 2650,75 2800,225 2800,1025 2800,1075 2625,1250 2250,1250 -2550,1250 -2625,1250 -2800,1075

## Silkscreen, mask and mechanical layers (free items; w line width, h text height)
Bottom Overlay:
  text "VCC" at -2375,750 h150
  text "GND" at -2350,650 h150
  text "RX" at -2400,550 h150
  text "TX" at -2400,450 h150
  text "RST" at -2575,50 h150